# Altium PCB PCB_motor_driver_v3.PcbDoc
Units mil, origin at the board's own origin, x right, y up, seen from the top; angles counter-clockwise.
Board outline 912.08 x 872.97 mil, 4 copper layers (Top Layer, Signal Layer 1, Signal Layer 2, Bottom Layer), stack 21.634 mil thick; 57 components, 62 nets, 286 pads, 107 vias.
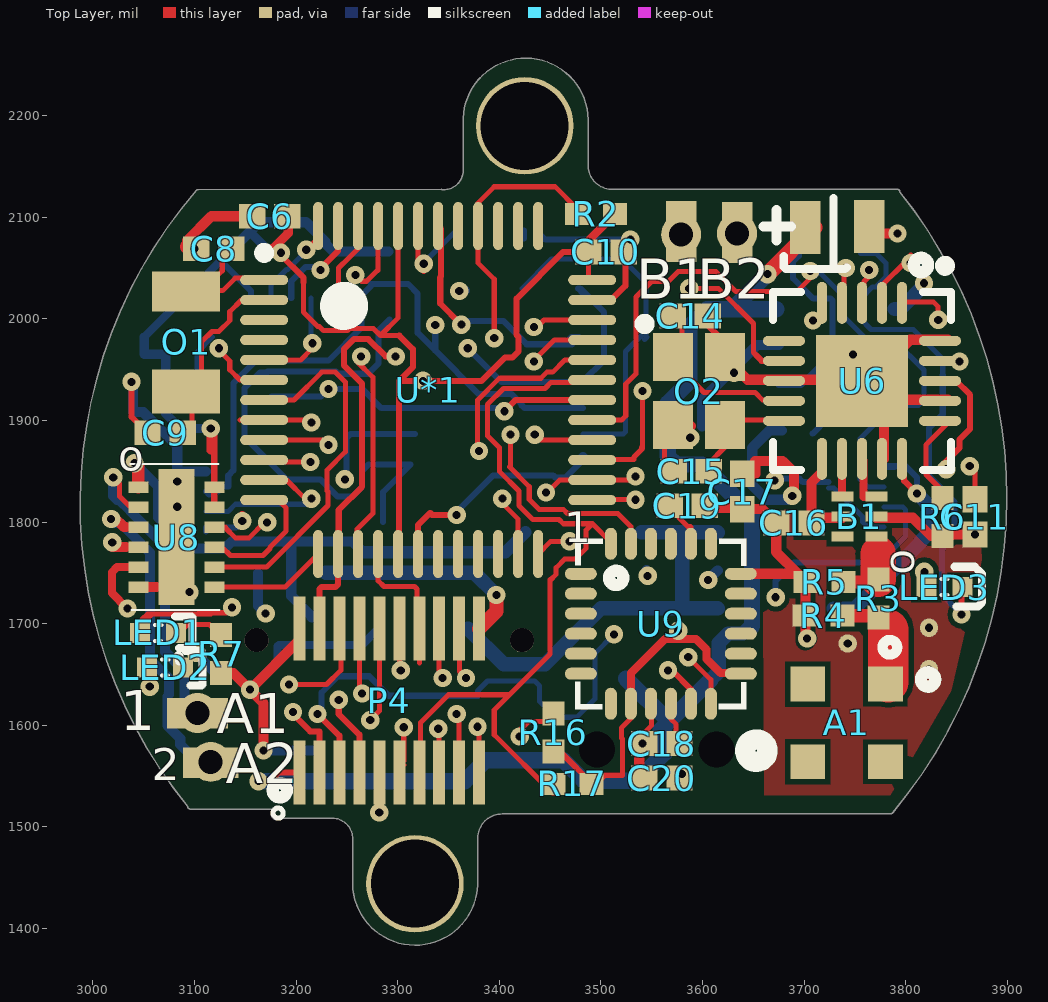
[diagram p0: Top Layer view]
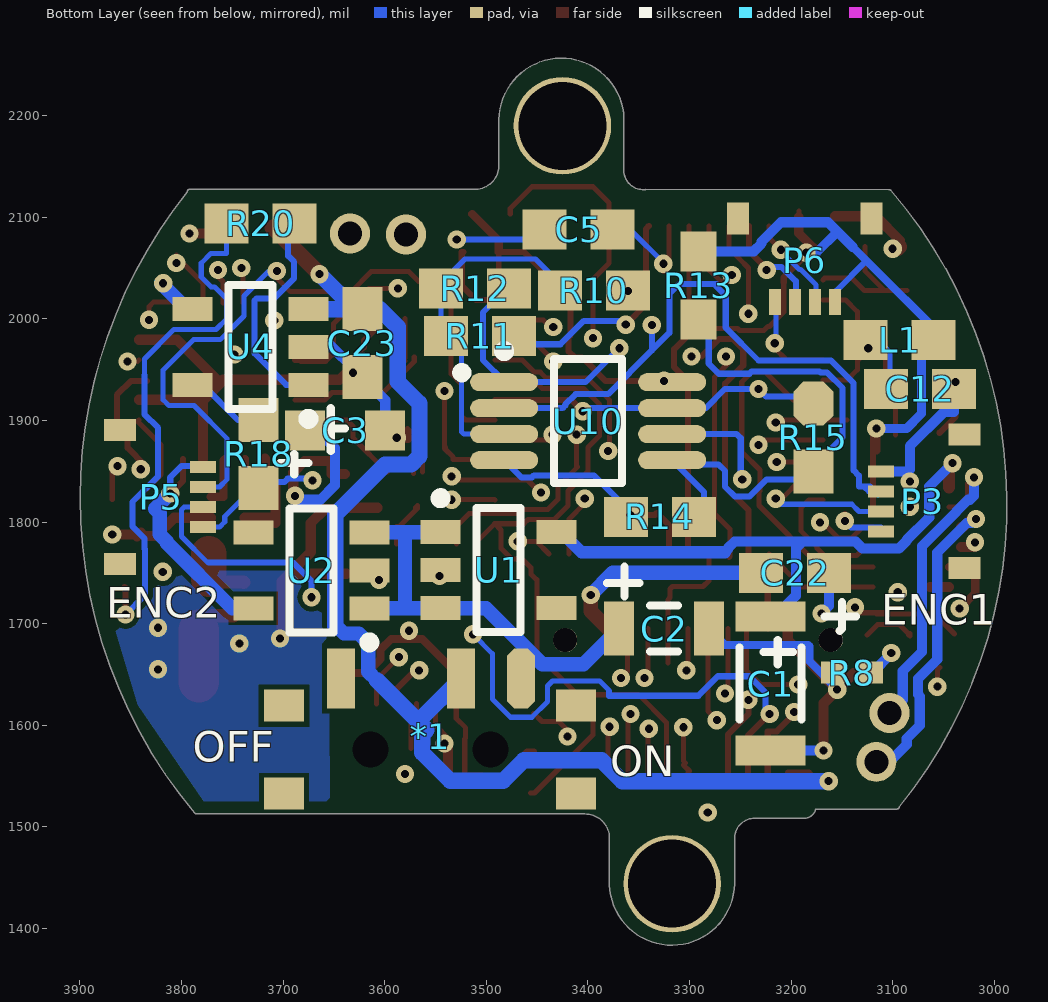
[diagram p1: Bottom Layer view, seen from below]
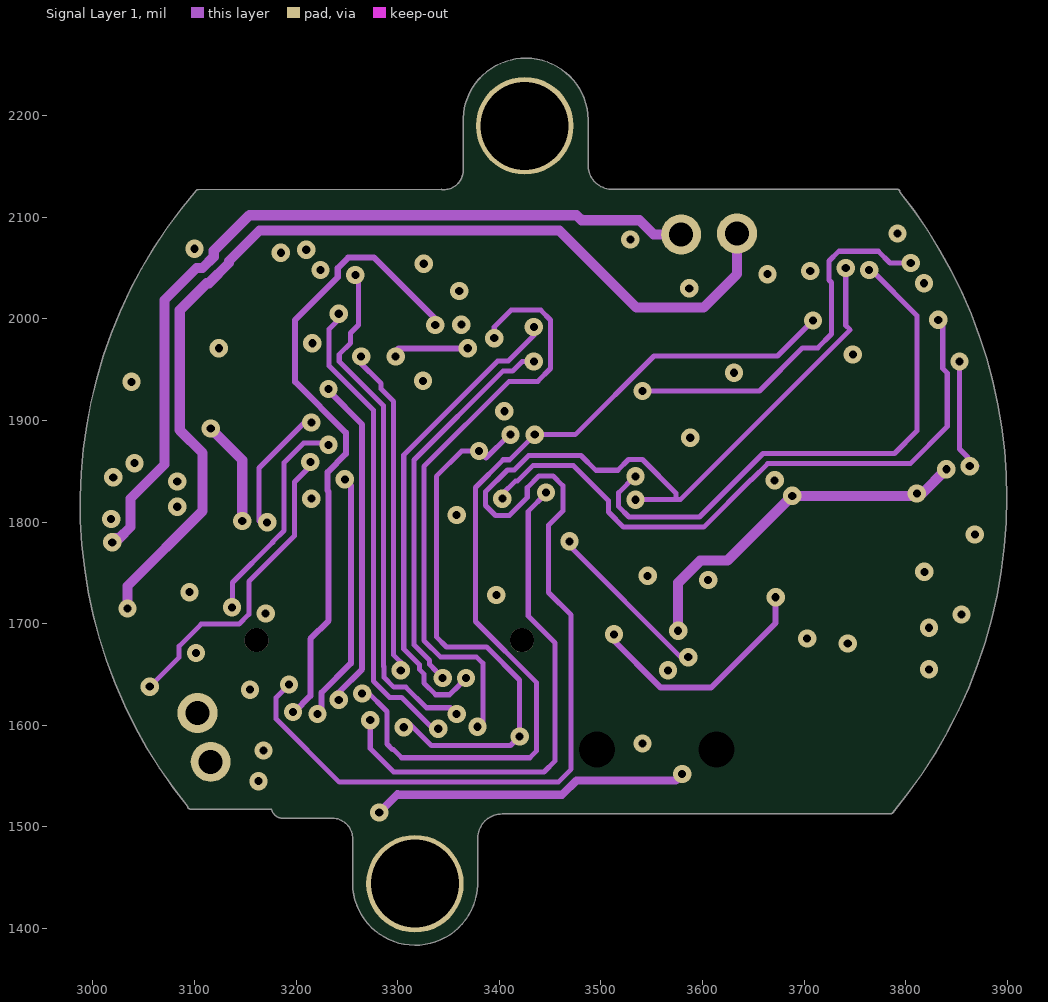
[diagram p2: Signal Layer 1]
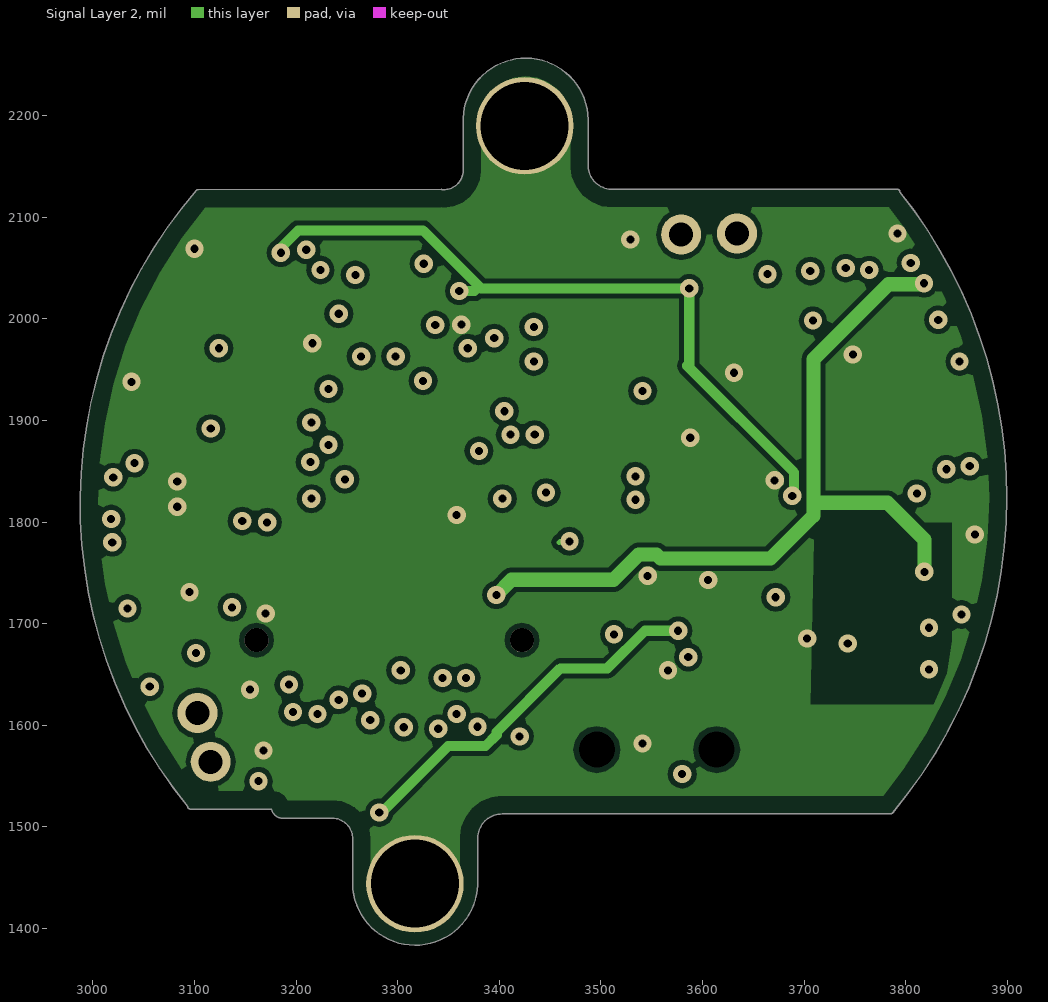
[diagram p3: Signal Layer 2]
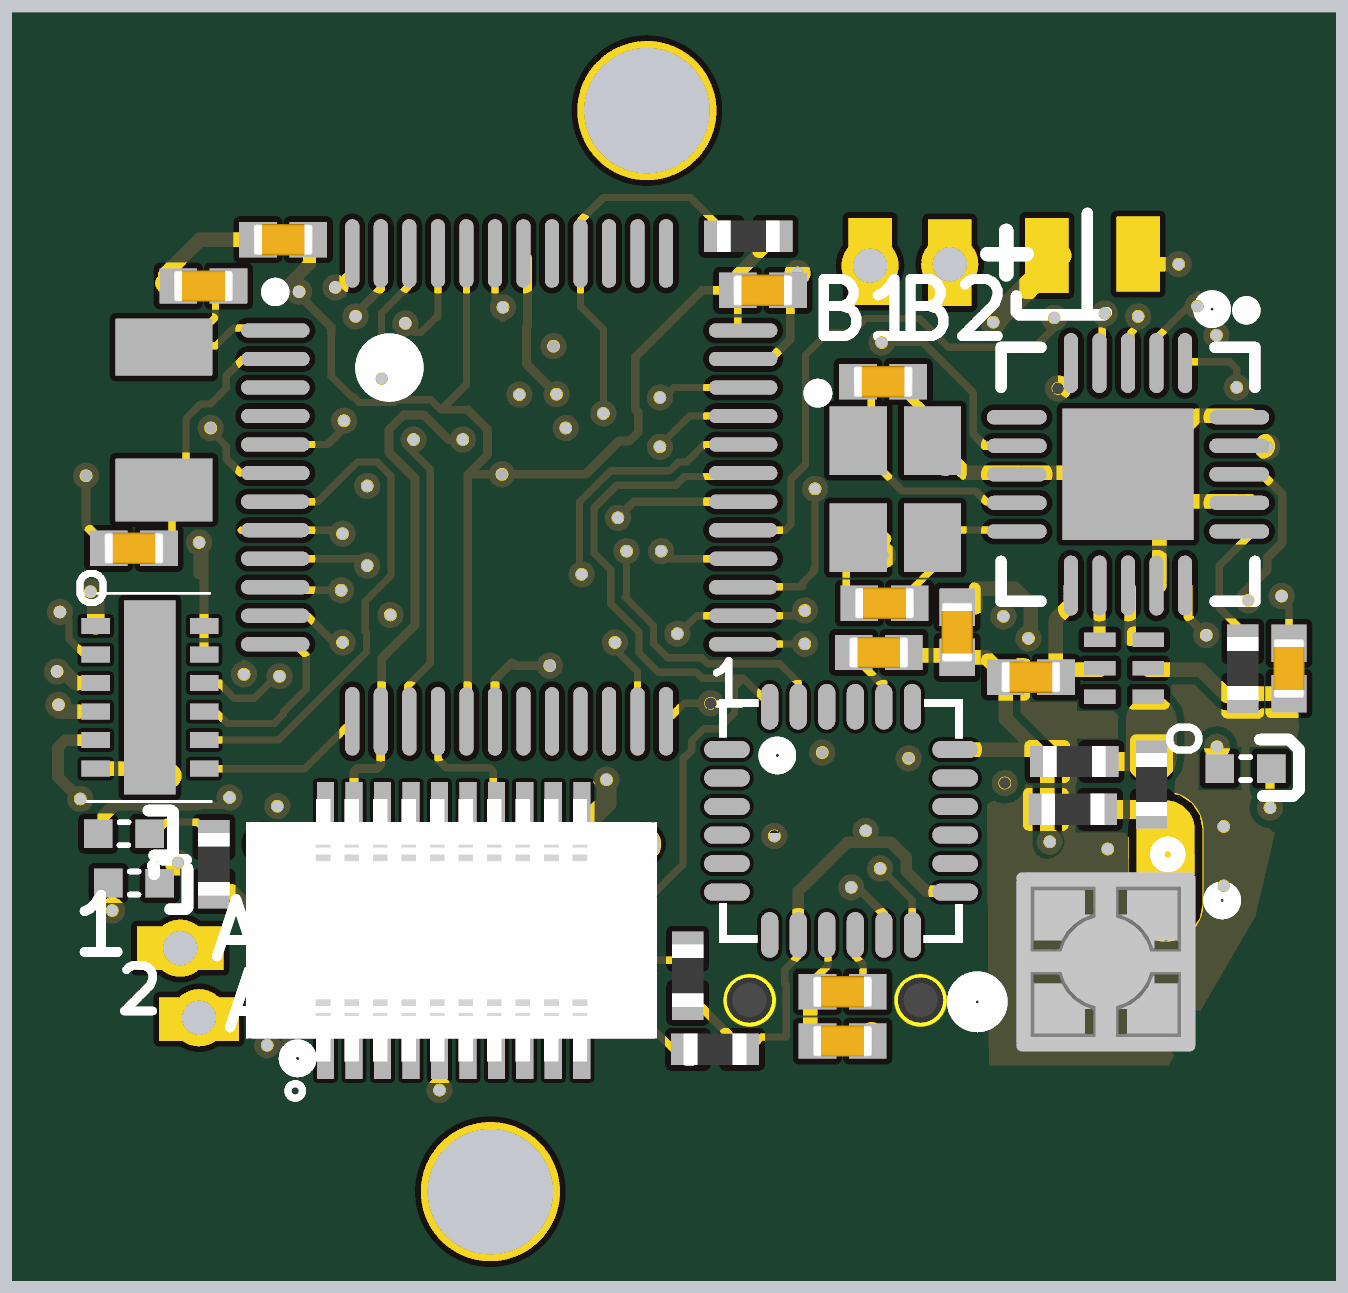
[diagram p4: 3D render of the assembled board from above, using the file's embedded part models]

## Layer stack, top to bottom
Top Solder: solder mask 0.4, Solder Resist, Dk 3.5
Top Layer: signal copper 1.4
Dielectric 1: core 3, FR-4, Dk 4.2
Signal Layer 1: signal copper 1.417
Dielectric 3: prepreg 5, Dk 4.2
Signal Layer 2: signal copper 1.417
Dielectric 2: core 8, Dk 4.2
Bottom Layer: signal copper 1.4
Bottom Solder: solder mask 0.4, Solder Resist, Dk 3.5

## Board outline
3187,1508.48 3234,1508.48 ccw(c3234,1511) 3234.17,1508.49 cw(c3235.55,1488.45) 3255.59,1489.91 3255.59,1444 ccw(c3258.11,1444) 3255.6,1443.88 cw(c3317.16,1445.01) 3255.59,1444.02 cw(c3258.11,1444.06) 3255.59,1444.06 3255.6,1443.88 ccw(c3317.16,1445.01) 3378.69,1442.78 ccw(c3376.18,1443) 3378.7,1443 3378.7,1488.99 cw(c3402.69,1488.69) 3402.97,1512.68 ccw(c3403,1515.2) 3403,1512.68 3785,1512.68 ccw(c3785,1515.2) 3787.04,1513.73 ccw(c3785.23,1515.48) 3787.16,1513.86 ccw(c3416.39,1823.74) 3899.61,1823.74 ccw(c3416.39,1823.74) 3794.27,2124.92 ccw(c3791.76,2125) 3794.27,2125 ccw(c3791.76,2125) 3791.76,2127.51 3512,2127.51 ccw(c3512,2125) 3511.88,2127.51 cw(c3511.01,2150.99) 3487.53,2150.1 ccw(c3485.02,2150) 3487.51,2150.35 3487.51,2195 ccw(c3484.99,2195) 3487.46,2195.48 ccw(c3485,2196) 3487.51,2196 ccw(c3485,2196) 3487.51,2196.04 ccw(c3425.95,2195.05) 3364.42,2197.3 ccw(c3366.92,2197) 3364.41,2197 3364.41,2144.08 ccw(c3366.92,2144.08) 3364.43,2143.72 cw(c3345.4,2146.4) 3343.3,2127.3 cw(c3345.4,2146.4) 3343.28,2127.3 3343.3,2127.3 ccw(c3343,2124.8) 3343,2127.32 3103.61,2127.29 ccw(c3103.61,2124.78) 3101.71,2126.42 ccw(c3460.68,1818.11) 3093.33,1519.84 ccw(c3095.84,1520) 3095.84,1517.48 3175.76,1517.48 ccw(c3187,1520)

## Design rules (kind name [scope] priority, off if disabled: settings)
Clearance [All] p1: gap=5 ignorepadtopadclearanceinfootprint=FALSE except(0: Arc-Hole Track-Hole SMDPad-Hole THPad-Hole Via-Hole Fill-Hole Poly-Hole Region-Hole Text-Hole; 6: Track-SMDPad)
MinimumSolderMaskSliver [All] p1 off: minsoldermaskwidth=5
PolygonConnect [All] p1: connectstyle=Direct reliefconductorwidth=10 reliefentries=4 polygonreliefangle="90 Angle" airgapwidth=10
RoutingVias [All] p1: holewidth=8 width=18 viastyle="Through Hole" minholewidth=8 minwidth=18 maxholewidth=28 maxwidth=50
SilkToSilkClearance [All] p1 off: silktosilkclearance=10
SilkToSolderMaskClearance [IsPad] p1 off: minsilkscreentomaskgap=10 clearancetoexposedcopper=TRUE
SolderMaskExpansion [All] p1: expansion=4 istentingtop=FALSE
Width [All] p1: maxlimit=50 minlimit=5 preferedwidth=5
27 further rules are at their usual default settings.

## Components (designator, comment, footprint, x,y, rotation, side; value= is the part's Value field where it differs from the comment)
*1 "ON_OFF_SWITCH" SWTICH_SMD_SIDE 3940,1516 r180 bottom
A1 "2.4GHz SMT On-ground MID Chip Antenna" 47948-0001 3734,1713 r270 top
B1 "2.45 GHz Bulan" 2450BM14A0002 3770,1821 r270 top
C1 "100uF 6.3V" CAP1206 3220,1641 r270 bottom
C2 "10uF 16V" CAP0805 3325,1695 r180 bottom
C3 "10uF 6.3V" "0805 TANTALUM" 3667,1889 r180 bottom
C5 "0.1uF" 0603W#1 3408,2088 r0 bottom
C6 "0.1uF" "0402 CAPACITOR" 3174,2100 r180 top
C8 "18pF" "0402 CAPACITOR" 3119,2068 r180 top
C9 "18pF" "0402 CAPACITOR" 3071,1887 r180 top
C10 "0.1uF" "0402 CAPACITOR" 3505,2065 r180 top
C11 "33nF X7R, +/- 10%" "0402 CAPACITOR" 3869,1805 r270 top
C12 "0.1uF" 0603W#1 3072,1931 r0 bottom
C14 "6pF NPO, +/- 2%" "0402 CAPACITOR" 3588,2002 r180 top
C15 "6pF NPO, +/- 2%" "0402 CAPACITOR" 3589,1851 r0 top
C16 "2200pF 5%" "0402 CAPACITOR" 3690,1800 r0 top
C17 "0.1uF" "0402 CAPACITOR" 3640,1830 r270 top
C18 "0.1uF" "0402 CAPACITOR" 3560,1581 r180 top
C19 "2200pF" "0402 CAPACITOR" 3585,1817 r0 top
C20 "10000pF" "0402 CAPACITOR" 3560,1547 r180 top
C22 "10uF 16V" 0603W#1 3197,1750 r180 bottom
C23 "4.7uF 10V" 0603W#1 3622,1977 r270 bottom
L1 "Ferrite bead" 0603W#1 3094,1979 r180 bottom
LED1 "LED BLUE" 0402W 3049,1691 r0 top
LED2 "LED RED" 0402W 3056,1657 r0 top
LED3 "LED ORANGE" 0402W 3823,1736 r0 top
O1 "32.768 kHz" "32.768 Crystal" 3091,2024 r45 top
O2 "16 MHz Crystal Cl=8pF" "2.5 x 2.0 crystal" 3621,1961 r270 top
P3 "FH33J-4S-0.5SH(99)" FH33J-4S-0.5SH(99) 3235,1820 r0 bottom
P4 "CONN HEADER 20POS" "DF12 20 POS" 3350,1630 r0 top
P5 "FH33J-4S-0.5SH(99)" FH33J-4S-0.5SH(99) 3655,1825 r180 bottom
P6 "FH33J-4S-0.5SH(99)" FH33J-4S-0.5SH(99) 3186,1893 r270 bottom
R2 "10K" "0402 RESISTOR" 3495,2105 r180 top
R3 "4.7K" "0402 RESISTOR" 3775,1725 r90 top
R4 "4.7K" "0402 RESISTOR" 3719,1706 r0 top
R5 "4.7K" "0402 RESISTOR" 3720,1739 r0 top
R6 "22K 1%" "0402 RESISTOR" 3838,1805 r90 top
R7 "330" "0402 RESISTOR" 3128,1670 r90 top
R8 "330" "0402 RESISTOR" 3140,1650 r180 bottom
R10 "50K" 0603W#1 3395,2028 r180 bottom
R11 "20K" 0603W#1 3505,1983 r0 bottom
R12 "200K" 0603W#1 3510,2030 r0 bottom
R13 "50K" 0603W#2 3291,2032 r90 bottom
R14 "20K" 0603W#1 3330,1805 r180 bottom
R15 "200K" 0603W#3 3178,1884 r270 bottom
R16 "4.7K" "0402 RESISTOR" 3455,1593 r90 top
R17 "4.7K" "0402 RESISTOR" 3472,1544 r180 top
R18 "4.99K 1%" 0603W#1 3724,1866 r90 bottom
R20 "1K 5%" 0603W#1 3723,2094 r180 bottom
U1 "3.7V REG" SOT-23-5 3545,1790 r180 bottom
U2 "3.3 V REG" SOT-23-5 3615,1715 r0 bottom
U4 "MCP73831T" SOT-23-5 3675,1935 r0 bottom
U6 "nRF24L01+" QFN20 3757,1939 r270 top
U8 "DRV8835" WSON-16 3082,1785 r0 top
U9 "MPU 6050" QFN24 3510,1740 r0 top
U10 "MCP6422" MSOP-MS8_N 3400,1900 r180 bottom
U*1 "ATSAMD21G" TQFN48 3330,1930 r0 top

## Footprints (in the part's own frame and the unit in brackets; to place one, negate y for a bottom-side part, rotate by r counter-clockwise, add the part's x,y. Pads: shape width x height; smd on the part's side, far side on the other; paste and mask are expansions set on the pad)
"2.5 x 2.0 crystal" [mm]
  rect 1.2x1 smd: 1(-0.033,-1.273) 2(1.667,-1.273) 3(1.667,0.026) 4(-0.033,0.025)
  body extent -0.46,-1.62 2.05,0.38, height 0.5
"32.768 Crystal" [mm] "for BLE radio"
  rect 1x1.7 smd rot 45: 1(0.063,0.036)
  rect 1.1x1.7 smd rot 45: 2(-1.705,-1.733)
  body extent -2.49,-2.54 0.83,0.78, height 0.9
"0402 CAPACITOR" [mm]
  rect 0.66x0.62 smd: 1(-0.441,-0.024) 2(0.439,-0.024)
  body extent -0.53,-0.3 0.52,0.25, height 0.55
"0402 RESISTOR" [mm]
  rect 0.6x0.55 smd: 1(-0.476,0.046) 2(0.474,0.046)
  body extent -0.55,-0.23 0.55,0.32, height 0.4
0402W [mm]
  rect 0.5x0.5 smd: 1(-0.066,0) 2(0.834,-0.001)
  silkscreen extent 0.31,-0.2 0.46,0.2, body extent -0.08,-0.25 0.85,0.25, height 0.2
0603W#1 [mm]
  rect 1.1x1 smd: 1(-0.825,0) 2(0.875,0)
  body extent -0.77,-0.4 0.83,0.4, height 0.8
0603W#2 [mm]
  rect 1x0.9 smd: 1(-0.825,0) 2(0.875,0)
  body extent -0.77,-0.4 0.83,0.4, height 0.8
0603W#3 [mm]
  oct 1.1x1 smd: 1(-0.825,0)
  rect 1.1x1 smd: 2(0.875,0)
  body extent -0.77,-0.4 0.83,0.4, height 0.8
"0805 TANTALUM" [mm]
  rect 1x1 smd: 1(-0.285,0.032) 2(1.716,0.032)
  body extent -0.28,-0.66 1.72,0.69, height 1.5
2450BM14A0002 [mm] "Balun for nRF8001"
  rect 0.25x0.55 smd: 1(0.901,0.027) 2(0.401,0.027) 3(-0.1,0.028) 4(-0.1,-0.822) 5(0.401,-0.823) 6(0.901,-0.823)
  body extent -0.39,-0.78 1.21,0.02, height 0.6
47948-0001 [mm] "2.4GHz SMT On-ground MID Chip Antenna"
  rect 0.87x0.87 smd: 1(1.84,1.168) 2(3.78,1.168) 3(1.84,-0.772) 4(3.78,-0.772)
  silkscreen extent 0.74,1.1 1.11,1.47, body extent 1.23,-1.37 4.37,1.77, height 4
CAP0805 [mm] "Chip Capacitor, 2-Leads, Body 2.0x1.2mm, IPC Medium Density"
  rect 0.75x1.35 smd: 1(-1.125,0) 2(1.125,0)
  silkscreen extent -0.35,-0.58 0.35,0.58, body extent -1,-0.62 1,0.63, height 0.78
CAP1206 [mm] "Chip Capacitor, 2-Leads, Body 3.2x1.6mm, IPC Medium Density"
  rect 0.75x1.75 smd: 1(-1.675,0) 2(1.675,0)
  silkscreen extent -0.9,-0.77 0.9,0.77, body extent -1.6,-0.8 1.6,0.8, height 1
"DF12 20 POS" [mm]
  round 0.6 hole 0.6: 1(-4.801,1.366) 1(1.836,1.365)
  rect 0.3x1.6 smd mask+0.07: 1(-3.73,-1.947) 2(-3.73,1.653) 3(-3.229,-1.947) 4(-3.229,1.653) 5(-2.729,-1.947) 6(-2.729,1.653) 7(-2.23,-1.947) 8(-2.229,1.653) 9(-1.73,-1.947) 10(-1.73,1.653) 11(-1.23,-1.947) 12(-1.23,1.653) 13(-0.73,-1.947) 14(-0.73,1.653) 15(-0.236,-1.947) 16(-0.236,1.653) 17(0.264,-1.947) 18(0.265,1.653) 19(0.764,-1.947) 20(0.765,1.653)
  silkscreen extent -4.39,-3.09 -4.13,-2.83, body extent -5.12,-2.44 2.08,2.16, height 3.3
FH33J-4S-0.5SH(99) [mm]
  rect 0.65x0.3 smd mask+0.05: 1(-3.141,0.743) 2(-3.141,0.242) 3(-3.141,-0.259) 4(-3.14,-0.758)
  rect 0.8x0.55 smd mask+0.05: 5(-5.223,1.661) 6(-5.224,-1.686)
  body extent -6.16,-2.01 -3.16,1.99, height 1.2
MSOP-MS8_N [mm]
  oval 1.7x0.45 smd: 1(-2.091,0.958) 2(-2.091,0.308) 3(-2.091,-0.342) 4(-2.091,-0.992) 5(2.109,-0.992) 6(2.109,-0.342) 7(2.109,0.308) 8(2.109,0.958)
  silkscreen extent -2.22,-1.57 0.86,1.86, body extent -1.59,-1.62 1.61,1.58, height 1.1
QFN20 [mm] "QFN, 20-Leads, Body 4.00x4.00mm, Pitch 0.50mm, Thermal Pad 2.50x2.50mm, IPC Low Density"
  oval 1.05x0.25 smd: 1(-1.95,1) 2(-1.95,0.5) 3(-1.95,0) 4(-1.95,-0.5) 5(-1.95,-1) 11(1.95,-1) 12(1.95,-0.5) 13(1.95,0) 14(1.95,0.5) 15(1.95,1)
  oval 0.25x1.05 smd: 6(-1,-1.95) 7(-0.5,-1.95) 8(0,-1.95) 9(0.5,-1.95) 10(1,-1.95) 16(1,1.95) 17(0.5,1.95) 18(0,1.95) 19(-0.5,1.95) 20(-1,1.95)
  rect 2.3x2.3 smd: 21(0,0)
  silkscreen extent -3,-2.22 2.22,2.23, body extent -2.08,-2.07 2.07,2.08, height 0.8
QFN24 [mm] "pitch 0.5mm"
  oval 0.8x0.3 smd mask+0.07: 1(-0.756,0.231) 2(-0.756,-0.269) 3(-0.756,-0.768) 4(-0.756,-1.268) 5(-0.756,-1.768) 6(-0.755,-2.268) 13(3.244,-2.268) 14(3.244,-1.768) 15(3.244,-1.269) 16(3.244,-0.769) 17(3.244,-0.269) 18(3.244,0.231)
  oval 0.3x0.8 smd mask+0.07: 7(-0.006,-3.018) 8(0.494,-3.018) 9(0.994,-3.018) 10(1.494,-3.018) 11(1.994,-3.018) 12(2.494,-3.018) 19(2.494,0.981) 20(1.994,0.981) 21(1.494,0.981) 22(0.994,0.981) 23(0.494,0.981) 24(-0.006,0.981)
  silkscreen extent -0.9,-3.16 3.38,1.12, body extent -0.76,-3.02 3.24,0.98, height 1.1
SOT-23-5 [mm] "3D view"
  rect 1x0.6 smd: 1(0,0) 2(0,-0.95) 3(0,-1.9) 4(2.9,-1.9) 5(2.9,0)
  silkscreen extent -0.13,-2.5 2,0.97, body extent -0.25,-2.5 3.15,0.6, height 1.45
SWTICH_SMD_SIDE [mm]
  round 0 hole 0.9: 0(8.284,1.524) 0(11.279,1.524)
  rect 0.7x1.5 smd: 1(7.547,3.3) 2(10.547,3.3)
  oct 0.7x1.5 smd: 3(12.047,3.3)
  rect 1x0.8 smd: NC(6.122,0.425) NC(6.122,2.625) NC(13.422,0.425) NC(13.422,2.625)
  body extent 5.93,-1.27 13.63,3.73, height 1.4
TQFN48 [mm] "TSQFP, 48-Leads, Body 7.00x7.00mm, Pitch 0.50mm, IPC High Density"
  oval 1.2x0.25 smd: 1(-4.1,2.75) 2(-4.1,2.25) 3(-4.1,1.75) 4(-4.1,1.25) 5(-4.1,0.75) 6(-4.1,0.25) 7(-4.1,-0.25) 8(-4.1,-0.75) 9(-4.1,-1.25) 10(-4.1,-1.75) 11(-4.1,-2.25) 12(-4.1,-2.75) 25(4.1,-2.75) 26(4.1,-2.25) 27(4.1,-1.75) 28(4.1,-1.25) 29(4.1,-0.75) 30(4.1,-0.25) 31(4.1,0.25) 32(4.1,0.75) 33(4.1,1.25) 34(4.1,1.75) 35(4.1,2.25) 36(4.1,2.75)
  oval 0.25x1.2 smd: 13(-2.75,-4.1) 14(-2.25,-4.1) 15(-1.75,-4.1) 16(-1.25,-4.1) 17(-0.75,-4.1) 18(-0.25,-4.1) 19(0.25,-4.1) 20(0.75,-4.1) 21(1.25,-4.1) 22(1.75,-4.1) 23(2.25,-4.1) 24(2.75,-4.1) 37(2.75,4.1) 38(2.25,4.1) 39(1.75,4.1) 40(1.25,4.1) 41(0.75,4.1) 42(0.25,4.1) 43(-0.25,4.1) 44(-0.75,4.1) 45(-1.25,4.1) 46(-1.75,4.1) 47(-2.25,4.1) 48(-2.75,4.1)
  silkscreen extent -4.22,1.8 -1.8,3.55, body extent -3.5,-3.5 3.5,3.5, height 1.2
WSON-16 [mm]
  rect 0.9x3.4 smd: 0(0.001,0.003)
  rect 0.5x0.28 smd mask+0.07: 1(-0.949,1.253) 2(-0.949,0.753) 3(-0.949,0.253) 4(-0.949,-0.247) 5(-0.949,-0.747) 6(-0.949,-1.247) 7(0.951,-1.247) 8(0.951,-0.747) 9(0.951,-0.247) 10(0.951,0.253) 11(0.951,0.753) 12(0.951,1.253)
  silkscreen extent -1.15,-1.82 1.08,1.83, body extent -1,-1.5 1,1.5, height 0.8

## Part data
*1: "SPDT SMD Side Switch"
A1: "Bluetooth antenna"
B1: "for nRF8001 chip"
C1 C2 C3: library part Capacitor_pol, "Polarised capacitor"
C5 C6 C8 C9 C10 C11 C12 C14 C15 C16 C17 C18 C19 C20 C22 C23: library part Capacitor, "SMD Cap 1206"
L1: library part "INDUCTOR Low DCR"
LED1 LED2 LED3: library part LED, "LED SMD 1206/0603"
O1: library part "32.768 Crystal"
O2: library part "16 MHz Crystal Wireless", "For BLE use"
P3 P5 P6: "0.5mm FPC connector"
R2 R3 R4 R5 R6 R7 R8 R10 R11 R12 R13 R14 R15 R16 R17 R18 R20: library part Resistor
U1 U2: library part MIC5205_VOLTAGE_REG, "5V LDO SMD"
U6: "2.4 GHz Radio"
U9: library part MPU_6500, "Gyro / accelerometer combo"
U10: "4.4 µA/Amplifier, 90 kHz Op Amp"
U*1: "IC MCU 32BIT 256KB FLASH 48TQFP"

## Free pads (board coordinates)
  rect 60x30 smd paste-60: 1(3103,1612)
  rect 55x30 smd paste-60: 1(3116,1563)
  round 96 hole 86.61: 1(3317,1444) 1(3425,2190)
  rect 30x60 smd paste-60: 1(3579,2086) 1(3634,2085)
  rect 30x52 smd paste-60: 1(3701,2090) 1(3764,2091)
  round 39.37 hole 23.62: 2(3103,1612) 2(3116,1564) 2(3579,2083) 2(3634,2084)

## Via types
v1: diameter 18, hole 8, Top Layer to Bottom Layer, tented both sides, 107 vias

## Nets (pads, with @x,y where several pads share a name; then routed paths per layer and width w, separated by ;. In a path a pad name is that pad's centre, name@x,y a point inside that pad or via, vN(x,y) a via of type N, cw(c..) or ccw(c..) an arc to the next point about the centre after c; other vN are vias at no path point)
5V: C22.1 LED3.1 P4.20 U4.4 | length 1058.8
  Top Layer w14: P4.20 3397.14,1712.11 v1(3397.14,1728.29)
  Signal Layer 1 w14: v1@3817,1751 v1(3818.39,1751)
  Signal Layer 2 w14: v1(3397.14,1728.29) 3412.04,1743.19 3512.49,1743.19 3537.3,1768 3554.7,1768 3558.7,1764 3667,1764 3709.3,1806.3 3709.3,1819 ; v1(3818,2035) 3817,2034 3783,2034 3709.3,1960.3 3709.3,1819 ; v1(3818.39,1751) 3818.39,1782.61 3782,1819 3709.3,1819
  Bottom Layer w14: C22.1 3375.43,1750 v1(3397.14,1728.29) ; U4.4 3794.8,2009.8 3820,2035 v1(3818,2035)
A5_AUX: P6.3 U*1.47 | length 104.2
  Top Layer w6: v1(3224,2048) 3224,2049.47 3241.42,2066.89 U*1.47
  Bottom Layer w6: P6.3@3195.19,2020.64 3195.19,2037.01 3209.18,2051 3217.04,2051 3217.15,2051.1 3223,2051.1 3224,2050.1 v1(3224,2048)
AINT1: U8.10 U*1.8 | length 271.1
  Top Layer w5: U8.10 3130.5,1794.96 3130.5,1794.17 3140.17,1784.5 3153.83,1784.5 3169.02,1799.68 v1(3171.5,1799.68) ; U*1.8@3145,1900.47 U*1.8 3212.53,1900.47 v1(3215,1898)
  Signal Layer 1 w5: v1(3171.5,1799.68) 3164.82,1799.68 3163.5,1801 3163.5,1853.16 3208.34,1898 v1(3215,1898)
  Signal Layer 2 w5: v1@3171.5,1793.5 v1(3171.5,1799.68)
AINT2: U8.9 U*1.12 | length 132.4
  Top Layer w5: U8.9 3127.14,1775.28 3135.42,1767 3167.41,1767 3174.28,1773.87 3174.28,1775.28 3190,1791 3190,1814 3182.27,1821.73 U*1.12
AOUT1: pad.1@3103,1612 pad.2@3103,1612 U8.2 | length 311.6
  Top Layer w5: v1(3020,1844) 3026.3,1837.7 3026.3,1825.3 3036.96,1814.65 U8.2
  Bottom Layer w10: v1(3020,1844) 3020,1825.92 3023.92,1822 3025.87,1822 3037,1810.87 3037,1810.33 3071.12,1776.21 3071.12,1672.29 3090,1653.41 3090,1625 pad.2@3103,1612
AOUT2: pad.1@3116,1563 pad.2@3116,1564 U8.3 | length 311.7
  Top Layer w5: 3031.61,1796 3032.65,1794.96
  Top Layer w10: v1@3019.87,1806 3030.91,1794.96 3032.65,1794.96
  Bottom Layer w10: v1(3018,1803) 3022,1799 3027.12,1799 3056.12,1770 3056.12,1664.75 3075,1645.87 3075,1630.13 3073.31,1628.44 3073.31,1599.7 3086.02,1587 3086.02,1581 3111.02,1556 pad.2@3114,1556
BIN1: U8.8 U*1.7 | length 361.8
  Top Layer w5: U8.8 3170.93,1755.59 3231.5,1816.17 3231.5,1829.83 3230.6,1830.73 3230.6,1851.27 3248.5,1869.17 3248.5,1937.83 3238.83,1947.5 3225.17,1947.5 3197.82,1920.16 U*1.7
BIN2: U8.7 U*1.13 | length 115.8
  Top Layer w5: U8.7 3189.06,1735.91 U*1.13
BOUT1: pad.1@3579,2086 pad.2@3579,2083 U8.4 | length 835.3
  Top Layer w10: v1@3019,1775.28 3032.65,1775.28
  Signal Layer 1 w10: v1(3019,1780) 3016.13,1780 3020.13,1784 3025.87,1784 3037,1795.13 3037,1823.13 3070.5,1856.63 3070.5,2018.5 3102,2050 3107.87,2050 3119,2061.13 3119,2067 3154,2102 3476,2102 3481,2097 3538,2097 3552,2083 pad.2@3579,2083
BOUT2: pad.1@3634,2085 pad.2@3634,2084 U8.5 | length 1071
  Top Layer w8: v1(3034,1715) 3033.75,1715 3018.65,1730.11 3018.65,1750.6 3023.64,1755.59 U8.5
  Signal Layer 1 w10: v1(3034,1715) 3034,1737 3108,1811 3108,1868 3085.5,1890.5 3085.5,2008.5 3112,2035 3114.08,2035 3134,2054.92 3134,2057 3164,2087 3459,2087 3535,2011 3601,2011 3634,2044 pad.2@3634,2084
CE: U6.1 U*1.23 | length 746.9
  Top Layer w5: v1(3403,1823) 3403,1818.38 3418.58,1802.8 U*1.23 ; U6.1@3796.37,2016.77 3827.23,2016.77 3832,2012 v1(3832,1999)
  Signal Layer 1 w5: v1(3403,1823) 3403,1827.5 3415.75,1840.25 3417.77,1840.25 3433.02,1855.5 3473,1855.5 3507.5,1821 3507.5,1809.83 3522.33,1795 3601.14,1795 3648.07,1841.93 3648.59,1841.93 3664.17,1857.5 3804.5,1857.5 3840.93,1893.93 3840.93,1946.74 3836.5,1951.17 3836.5,1994.5 v1(3832,1999)
CSN: U6.2 U*1.27 | length 538.5
  Top Layer w5: U*1.27 3491.42,1861.5 3532.5,1861.5 3532.5,1863.91 3541,1872.41 3540,1873.41 3541,1874.41 v1(3541,1929) ; U6.2@3778.69,2015.77 3778.69,2034.94 3798.74,2055 v1(3805,2055)
  Signal Layer 1 w5: v1(3541,1929) 3656,1929 3698.5,1971.5 3713.5,1971.5 3727,1985 3727,2035.67 3724.5,2038.17 3724.5,2056.83 3734.17,2066.5 3773.06,2066.5 3784.56,2055 v1(3805,2055)
ENC_OUT1: P3.3 P4.3 U10.2 | length 1345.8
  Top Layer w6: v1(3196.86,1613) 3196.86,1611.1 3213.96,1594 3222.86,1594 P4.3
  Signal Layer 1 w6: v1(3196.86,1613) 3198,1613 3214,1629 3214,1685 3232,1703 3232,1830.04 3231,1831.04 3231,1849.04 3249,1867.04 3249,1888.04 3199,1938.04 3199,1998.96 3241,2040.96 3241,2049.94 3251.27,2060.21 3276.79,2060.21 3337,2000 v1(3337,1994)
  Bottom Layer w6: P3.3@3114.55,1827 P3.3 3123.16,1830.19 3127.91,1834.94 ; P3.3@3122.49,1834.94 3127.91,1834.94 ; v1(3337,1994) 3337,1969 ; U10.2 3424.88,1912.12 3422,1915 3422,1916.04 3412.04,1926 3380,1926 3337,1969 ; 3127.91,1834.94 3133.18,1834.94 3133.18,1845.63 3138.32,1850.77 3138.32,1936.58 3160.87,1959.13 3203.82,1959.13 3203.96,1959 3232,1959 3264.28,1991.28 3264.28,2022.93 3273.57,2032.22 3273.57,2034.43 3310.16,2034.43 3319.69,2024.9 3319.69,1986.31 3337,1969
ENC_OUT2: P4.5 P5.3 U10.6 | length 1294.1
  Top Layer w6: v1(3221,1611) 3221.42,1611 3242.54,1589.87 P4.5
  Signal Layer 1 w6: v1(3221,1611) 3225,1615 3225,1632.04 3254,1661.04 3254,1836 v1(3248,1842) ; v1(3512.96,1689.45) 3512.96,1689 3509.96,1686 3558.96,1637 3608.36,1637 3672,1700.64 v1(3672,1726)
  Bottom Layer w5: 3379,1633.52 3379,1634.23 3388.37,1643.59 3434.78,1643.59 3439.76,1638.62 3439.76,1623.24 3455.11,1607.89 3476.12,1607.89 3494,1625.77 3494,1670.49 v1(3512.96,1689.45) ; 3773.48,1760 3774.19,1760 3799.91,1785.72 3799.91,1787.07 3800,1787.16 3800,1812 3797.19,1814.81 P5.3
  Bottom Layer w6: v1(3221,1611) 3225,1615 3225,1632.04 3241.15,1648.19 3272.04,1648.19 3291.23,1629 3379,1629 3379,1633.52 ; v1(3248,1842) 3249.52,1843.52 3249.52,1882.52 3253.53,1886.53 U10.6 ; v1(3512.96,1689.45) v1@3514.4,1688 ; v1(3672,1726) 3672,1742 3690,1760 3773.48,1760
GND: B1.2 C1.2 C2.2 C3.2 C5.2 C6.2 C8.2 C9.2 C10.1 C11.2 C12.1 C14.1 C15.1 C16.1 C17.2 C18.2 C19.2 C20.2 C22.2 C23.2 O2.2 O2.4 P3.4 P4.2 P5.4 P6.4 pad.1@3317,1444 pad.1@3425,2190 pad.1@3764,2091 R4.1 R5.1 R6.1 R7.1 R8.1 R11.1 R14.1 R18.1 U1.2 U2.2 U4.2 U6.8 U6.14 U6.17 U6.20 U6.21 U8.0 U8.6 U9.9 U9.11 U9.18 U10.4 U*1.5 U*1.18 U*1.35 U*1.42 | length 2849.2
  Top Layer w5: U*1.5 3204.53,1959.53 3216,1971 v1(3216,1976) ; v1(3541,1582) 3541,1582.61 3536.81,1586.81 3550,1600 3550,1620.32 U9.9 ; O2.2@3562,1889 3574.51,1889 O2.2@3577.38,1891.86 ; C15.1@3562.65,1849.07 3562.65,1877.14 3568.51,1883 v1(3588,1883) ; C15.1@3571.65,1847.88 C15.1 ; C19.2@3607.3,1814.07 C19.2@3607.3,1814.43 ; O2.4@3620.35,1971.94 O2.4@3626,1966.28
  Top Layer w6: v1(3038,1938) 3038,1903.63 C9.2 ; U*1.18 3320.16,1797.16 3332,1809 3334,1807 v1(3358,1807) ; U*1.42 3342.68,2088.57 3342.68,2041.64 3341.9,2040.86 3341.9,2015.1 v1(3362.68,1994.32) v1@3362.37,1994 ; U*1.35 3510.12,2018.58 3524.04,2032.5 3524.04,2065.93 C10.1 ; v1(3529,2078) C10.1@3529.73,2078 ; v1(3566,1654) 3570,1654 3588.5,1635.5 U9.11 ; C14.1 3605.35,1993.65 3620.35,1978.65 O2.4@3620.35,1971.94
  Top Layer w10: U8.6 3062.91,1735.91 3063,1736 ; C8.2@3092.7,2070.93 3092.7,2077.04 3116.59,2100.93 C6.2 ; R7.1@3125.19,1651.28 3138.33,1651.28 v1(3154.6,1635) ; v1(3167.94,1575.06) 3167.94,1621.66 v1(3154.6,1635) ; P4.2 3203.17,1683.57 v1(3154.6,1635) ; C20.2@3537.7,1548.93 3537.7,1578.7 v1(3541,1582) ; v1(3546,1747) 3546,1746 v1@3547,1745 ; v1(3588,1883) 3577.27,1883 O2.2@3588.64,1894.36 ; v1@3603,1743 v1(3605.6,1743) ; C19.2@3607.3,1814.07 3637.7,1814.07 C17.2 3659.03,1812.7 C16.1 3672.65,1770.43 R5.1@3693.98,1749.11 ; O2.4 3644.3,1939.99 U6.8@3682.23,1939.99 ; U9.18 R5.1@3693.98,1749.11 ; U6.8@3682.23,1939 U6.8@3682.23,1939.99 ; v1(3703,1685.45) 3701.28,1683.72 3701.28,1741.81 R5.1@3693.98,1749.11 ; U6.21@3759,1939 3778.69,1919.31 U6.14@3778.69,1862.23 ; U6.21@3759,1940 U6.8@3682.23,1940 ; pad.1@3765,2092 3773,2084 v1(3792,2084) ; B1.2@3771.08,1804.22 3807,1804.22 3824.95,1786.28 R6.1 ; R6.1@3839.69,1789.78 3843.7,1785.77 3845.62,1787.7 v1(3868.07,1787.7) ; U6.17@3841.77,1920.32 3784.69,1920.32 3765,1940 3804.37,1979.37 U6.20@3841.77,1979.37
  Top Layer w14: C8.2@3092.7,2070.93 3094.63,2069 v1(3100,2069) ; v1@3169,1710 v1(3170,1710)
  Signal Layer 1 w6: v1(3566,1654) v1@3568,1656
  Signal Layer 1 w10: v1(3154.6,1635) v1@3157,1635
  Bottom Layer w5: P6.4@3214.85,2020.61 3214.85,1972.15 3216,1973.3 v1(3216,1976) ; R18.1 3729.21,1833.52 3757.36,1805.37 3757.36,1800.16 3762.37,1795.15 P5.4
  Bottom Layer w6: v1(3358,1807) 3358,1810 3394,1846 3453.04,1846 3455.04,1844 3465.39,1844 U10.4 ; v1@3362.68,1998 3403.96,1998 3426.96,1975 R11.1@3464,1975 ; C5.2@3424.45,2079.27 C5.2@3424.45,2087 ; C5.2@3436.45,2087 3445.45,2078 v1(3529,2078) ; v1(3671,1841) 3672.77,1842.77 3695.34,1842.77 3698.8,1839.31 R18.1@3724.12,1839.31 ; R11.1@3464,1975 3471.52,1975 3478.52,1982 3471,1982 R11.1@3464,1975
  Bottom Layer w8: v1(3154.6,1635) 3154.6,1635.76 3181.8,1662.96 3181.8,1677.8 3183,1679 3264.71,1679 C2.2
  Bottom Layer w10: C12.1 3039.52,1908.2 3049.64,1908.2 3083,1874.84 3083,1852 3085.15,1849.85 P3.4 ; C22.2 3162.55,1717.45 v1(3170,1710) ; v1(3167.94,1575.06) C1.2 ; U10.4 U10.4@3482.33,1864 ; U1.2 3545,1747 v1(3546,1747) ; C3.2@3599.43,1894 3599.43,1919.98 C23.2 ; v1(3605.6,1743) U2.2 ; C23.2@3628.72,1949.28 3653.85,1974.4 U4.2@3675,1974.4
  Bottom Layer w14: v1(3170,1710) v1@3171.06,1708.94
  other v1: 3823,1655 3743,1680.45 3823,1696 3095,1731 3083,1815 3083,1840 3631,1947 3748,1965
INT_ENC1: P4.4 R12.1 U10.1 U*1.14 | length 694
  Top Layer w6: P4.4 3222.87,1733.87 3224.96,1735.96 3238.7,1735.96 3241.42,1738.68 U*1.14 3242,1769.17 3242,1811.96 3265,1834.96 3265,1936.18 3247,1954.18 3247,1970.04 3256.96,1980 3271.04,1980 3288.04,1963 v1(3298,1963)
  Signal Layer 1 w6: v1(3298,1963) 3298,1968 3301,1971 v1(3369,1971)
  Bottom Layer w6: v1(3369,1971) 3402.29,1937.71 U10.1 3482.33,1938.57 3503.17,1959.41 3503.17,2006.41 3479.59,2030 R12.1 R12.1@3482.33,2025.19
INT_ENC2: P4.7 R15.1 U10.7 U*1.30 | length 745.6
  Top Layer w6: v1(3242,1625) 3242,1611 3262.22,1590.78 P4.7 ; v1(3405,1909) 3416.16,1920.16 U*1.30
  Signal Layer 1 w6: v1(3232,1931) 3232,1929 3265,1896 3265,1655.23 3242,1632.23 v1(3242,1625) ; v1(3405,1909) v1@3406.47,1909
  Bottom Layer w6: R15.1@3176,1923.48 3178,1923.48 3224.48,1923.48 v1(3232,1931) 3265,1931 3283.88,1912.12 U10.7 3405.59,1912.12 3405,1911.53 v1(3405,1909)
INT_IMU: U9.12 U*1.24 | length 268.1
  Top Layer w5: U*1.24 3450.68,1781 v1(3469,1781) ; v1(3586,1667) 3608.18,1644.82 U9.12
  Signal Layer 1 w5: v1(3469,1781) 3469,1776.67 3578.67,1667 v1(3586,1667)
  Signal Layer 2 w5: 3459,1780 3460,1781 v1(3469,1781)
IR_SEND1: P3.2 U*1.11 | length 162.9
  Top Layer w5: U*1.11 3190.58,1841.42 3209,1823 v1(3215,1823)
  Bottom Layer w5: P3.2 3133.12,1810.46 3140.17,1817.5 3209.5,1817.5 v1(3215,1823)
IR_SEND2: P5.2 U*1.29 | length 702.1
  Top Layer w5: U*1.29 3520.47,1900.47 3524.5,1904.5 3524.5,1935.83 3534.5,1945.83 3534.5,2021.5 3549.75,2036.75 3566.42,2036.75 3576.17,2046.5 3613.13,2046.5 3632.86,2026.77 3692.77,2026.77 3708,2042 3706.07,2043.93 v1(3706.07,2047)
  Bottom Layer w5: v1(3706.07,2047) 3706.07,2046.93 3711,2042 3715,2046 3738.5,2022.5 3738.5,2002.82 3761.83,1979.49 3788.2,1979.49 3818,1949.69 3818,1920.31 3812.38,1914.69 3787.69,1914.69 3755,1882 3755,1842 3762.46,1834.54 P5.2
IRQ: U6.6
LED1: LED1.1 U*1.9 | length 422.7
  Top Layer w5: LED1.1@3039,1689.81 LED1.1@3048.37,1699.18 ; v1(3137,1716) 3131.69,1710.69 3117,1710.69 ; U*1.9 3227.21,1880.79 v1(3232,1876) ; LED1.1@3048.37,1699.18 3058.88,1709.69 ; LED1.1@3048.37,1699.18 3048.37,1704.15 3053.9,1709.69 3058.88,1709.69 ; 3058.88,1709.69 3103.29,1709.69 ; 3103.29,1709.69 3116,1709.69 3117,1710.69 ; 3103.29,1709.69 3104.29,1710.69 3117,1710.69
  Signal Layer 1 w5: v1(3137,1716) 3138,1717 3138,1720 3137.5,1720.5 3137.5,1740.5 3177,1780 3177,1780.5 3188,1791.5 3188,1858.33 3207.27,1877.6 3230.4,1877.6 v1(3232,1876)
LED2: LED2.1 U*1.10 | length 374.7
  Top Layer w5: LED2.1 3056,1654.39 v1(3056,1638) ; U*1.10 3170.68,1859 v1(3214,1859)
  Signal Layer 1 w5: v1(3056,1638) 3084.91,1666.91 3084.91,1677.86 3106.54,1699.5 3143.83,1699.5 3153.5,1709.17 3153.5,1741.5 3198.5,1786.5 3198.5,1839.5 3214.1,1855.1 3214,1855.2 v1(3214,1859)
MISO: P4.8 U6.5 U*1.28 | length 1029.8
  Top Layer w5: P4.8 3262.22,1633.96 v1(3265,1631.19) ; v1(3434.87,1886) 3440.08,1880.79 U*1.28
  Signal Layer 1 w5: v1(3265,1631.19) 3267.81,1634 3269,1634 3289.5,1613.5 3289.5,1581.5 3295,1576 3296,1576 3304,1568 3430,1568 3436.5,1574.5 3436.5,1642.23 3376.5,1702.23 3376.5,1833.98 3403.84,1861.32 3410.19,1861.32 v1(3434.87,1886) 3474.67,1886 3552.16,1963.5 3673.91,1963.5 v1(3708.68,1998.28)
MOSI: P4.6 U6.4 U*1.25 | length 1526.1
  Top Layer w5: v1(3193,1640) 3230,1640 3244,1654 3244,1693.62 P4.6 ; U*1.25 3491.68,1822 v1(3534,1822) ; U6.4@3739.32,2015.77 3739.32,2048.32 v1(3741,2050)
  Signal Layer 1 w5: v1(3193,1640) 3180.36,1627.36 3180.36,1606.17 3242.52,1544 3458,1544 3470.74,1556.74 3470.74,1708.51 3448.5,1730.75 3448.5,1796.83 3462.5,1810.83 3462.5,1835.83 3452.83,1845.5 3439.17,1845.5 3427.5,1833.83 3427.5,1824.17 3409.83,1806.5 3396.17,1806.5 3386.5,1816.17 3386.5,1829.83 3407.99,1851.32 3414.7,1851.32 3428.88,1865.5 3480.5,1865.5 3495,1851 3516.67,1851 3527.17,1861.5 3540.83,1861.5 3574,1828.33 3574,1822 ; v1(3534,1822) 3574,1822 ; v1(3741,2050) 3741,1993.49 3745.32,1989.17 3578.14,1822 3574,1822
NetA1_1: A1.1 R3.1 R4.2 | length 72
  Top Layer w13: R4.2@3748.68,1707.81 R3.1@3769.19,1707.81
  Top Layer w40: A1.1@3783,1642.52 3783,1694
NetB1_1: B1.1 R3.2 R5.2 | length 67.3
  Top Layer w12: R3.2@3767.09,1741.81 R3.2@3771.08,1745.79
  Top Layer w13: R5.2 3772,1741 R3.2
  Top Layer w35: 3773,1769 3773.19,1768.81 R3.2
NetB1_3: B1.3 U6.13 | length 51.1
  Top Layer w8: U6.13 3758.46,1860.76 3758.46,1824.54 3758.85,1824.92 B1.3
NetB1_4: B1.4 U6.12 | length 37.4
  Top Layer w8: U6.12 3737.32,1825.24 B1.4
NetB1_5: B1.5 C16.2 U6.11 | length 99.9
  Top Layer w10: U6.11 3717.63,1849.33 3707.3,1839 C16.2 3712.46,1804.23 B1.5@3737.62,1804.23
NetC5_1: C5.1 U*1.43 | length 94.4
  Top Layer w5: v1@3320.16,2053.59 U*1.43 ; v1@3325.68,2046.51 v1(3325.68,2054.27)
  Bottom Layer w5: v1(3325.68,2054.27) 3325.68,2053.59 3326,2053.28 3324.9,2054.38 C5.1@3357.52,2087
NetC8_1: C8.1 O1.1 U*1.1 | length 139.9
  Top Layer w5: O1.1@3085.75,2027.75 O1.1@3107.75,2027.75 ; C8.1@3127.35,2070.93 3127.35,2047.35 O1.1@3107.75,2027.75 ; U*1.1 3166.85,2040 3140,2040 3127.75,2027.75 O1.1@3107.75,2027.75
NetC9_1: C9.1 O1.2 U*1.2 | length 169.6
  Top Layer w5: O1.2@3092.78,1929.26 3107,1943.48 3107,1977.33 3117.17,1987.5 3124,1987.5 3134.69,1998.19 3134.69,2007.02 3146.25,2018.58 U*1.2 ; C9.1@3097.35,1885.93 O1.2@3097.35,1917.7
NetC11_1: C11.1 U6.19 | length 163.7
  Top Layer w5: U6.19@3841.77,1959.69 3843.46,1958 v1(3853,1958) ; v1(3863,1855) 3868.07,1849.93 C11.1
  Signal Layer 1 w5: v1(3853,1958) 3853,1872 3870,1855 v1(3863,1855)
NetC12_2: C12.2 L1.1 U*1.6 | length 116.8
  Top Layer w5: v1(3124,1971) 3124,1969.13 3134.71,1958.42 3134.71,1949.85 3144.72,1939.84 U*1.6
  Bottom Layer w5: C12.2@3102.45,1935 3102.45,1966.97 L1.1@3117.48,1982
NetC14_2: C14.2 O2.1 U6.9 | length 178.2
  Top Layer w5: O2.1 3570.87,1958.09 3601.47,1927.49 3651.8,1927.49 3659.29,1920 3687.91,1920 U6.9@3688.23,1920.32 ; O2.1@3579.87,1958.5 O2.1@3581.26,1959.89 ; O2.1@3579.87,1961.28 C14.2@3579.87,2000.1
NetC15_2: C15.2 O2.3 U6.10 | length 119.1
  Top Layer w5: C15.2@3597.3,1849.07 3631.01,1882.78 3631.01,1894.37 3637.27,1900.63 U6.10@3688.23,1900.63
NetC18_1: C18.1 U9.10 | length 46
  Top Layer w5: U9.10 3568.83,1606.17 3574.07,1600.93 C18.1@3574.07,1577.35
NetC19_1: C19.1 U9.20 | length 48.7
  Top Layer w5: C19.1 3567.65,1813.5 3585.79,1795.37 3588.36,1795.37 3588.49,1795.23 U9.20 ; C19.1@3569.65,1812.91 C19.1@3569.65,1814.07
NetLED1_2: LED1.2 R7.2 | length 53.5
  Top Layer w5: LED1.2@3082.85,1687.95 3082.85,1688.54 3093.31,1699 3114.87,1699 R7.2@3125.19,1688.68 ; LED1.2@3082.85,1690.05 3083.6,1689.29 3083.9,1689 LED1.2@3084.22,1688.68
NetLED2_2: LED2.2 R8.2 | length 28.1
  Bottom Layer w10: v1(3101.41,1671.03) 3101.41,1670.59 3120.19,1651.81 R8.2
NetLED3_2: LED3.2 R20.1 | length 530.9
  Top Layer w6: v1(3855,1709) 3855,1735.1 LED3.2
  Bottom Layer w5: R20.1 3755.48,2064.5 3770.83,2064.5 3780.5,2054.83 3780.5,2041.17 3770.83,2031.5 3767.35,2031.5 3755.48,2019.63 3755.48,1999.98 3765.97,1989.49 3807.51,1989.49 3836.43,1960.57 3836.43,1944.69
  Bottom Layer w6: 3836.43,1944.69 3836.43,1906.04 3823,1892.61 3823,1844.96 3848.22,1819.74 3848.22,1795.78 3836.43,1784 3836.43,1773.7 3835.92,1773.18 3835.92,1728.08 v1(3855,1709)
NetR6_2: R6.2 U6.16 | length 96.8
  Top Layer w5: U6.16@3841.77,1900.63 3843.19,1899.21 3820,1876.01 3820,1846.87 R6.2@3843.19,1823.68
NetR10_1: R10.1 R11.2 R12.2 U10.3 | length 344.1
  Bottom Layer w5: R10.1@3422.48,2030 3451.48,2059 3521,2059 3544.45,2035.55 R12.2 R11.2@3544.45,1982 ; U10.3 3522,1886.53 3524.3,1888.82 3524.3,1967.85 R11.2 ; R11.2@3542.95,1979.5 R11.2@3545.45,1982
NetR13_1: R13.1 R14.2 R15.2 U10.5 | length 517.5
  Bottom Layer w6: R14.2@3285.55,1800 3285.55,1829.51 3312.59,1856.55 3271.21,1856.55 3265,1850.34 3265,1834.96 3255.04,1825 3240.96,1825 3223.96,1842 3190.55,1842 3149.32,1883.24 3149.32,1932.02 3164.43,1947.13 3171,1947.13 3172,1948.13 3189.57,1948.13 3189.7,1948 3239.04,1948 3241.04,1946 3271.04,1946 3281,1955.96 3281,1988.52 R13.1@3292,1999.52
NetR18_2: R18.2 U4.5 | length 100
  Bottom Layer w6: R18.2@3708.45,1887 R18.2@3722.95,1901.5 ; R18.2 3744.45,1900.45 3779,1935 U4.5
NetR20_2: R20.2 U4.1 | length 223.9
  Bottom Layer w6: U4.1 3697,1935 3728,1966 3728,2018 3726.17,2019.83 3709.19,2019.83 3698.41,2030.61 3689.07,2039.96 3689.07,2056.07 3695,2062 3695,2095 R20.2@3695.55,2095
PB_03: P6.2 U*1.48 | length 90.7
  Top Layer w5: v1(3210,2068) 3221.73,2079.73 U*1.48
  Bottom Layer w5: P6.2@3175.46,2020.66 3175.46,2033.46 3190.5,2048.5 3191.83,2048.5 3210,2066.67 v1(3210,2068)
RESET: P4.19 R2.2 U*1.40 | length 888.7
  Top Layer w5: v1(3378.5,1598.5) 3380.09,1596.91 P4.19 ; v1(3395,1981) 3395,2039 3379.21,2054.79 U*1.40 3379.21,2114.21 3395,2130 3455,2130 3476.32,2108.68 R2.2
  Signal Layer 1 w5: v1@3383.77,1603.77 3383.77,1661 3377.77,1667 3342.28,1667 3326,1683.28 3326,1854.79 3409.71,1938.5 3437.83,1938.5 3450.5,1951.17 3450.5,1998.83 3440.83,2008.5 3411.5,2008.5 3395,1992 v1(3395,1981)
RX: P4.14 U*1.16 | length 141.7
  Top Layer w5: U*1.16 3280.79,1742.21 3286.54,1736.46 3316.54,1736.46 3319,1734 3319,1725.68 3321.27,1723.41 P4.14 3321.27,1661.27
SCK: P4.10 U6.3 U*1.26 | length 1281.6
  Top Layer w5: v1(3273,1605) 3281.91,1613.91 P4.10 ; v1(3446,1829) 3445,1829 3446,1828 3459.42,1841.42 U*1.26 v1@3531.42,1841.42 ; U6.3@3759,2015.77 3759,2036.69 3768.31,2046 3766.32,2048 v1(3764,2048)
  Signal Layer 1 w5: v1(3273,1605) 3273,1577 3296,1554 3444,1554 3455,1565 3455,1681 3428.5,1707.5 3428.5,1810.5 3446,1828 v1(3446,1829) ; v1(3534,1845) 3533.67,1845 3517.5,1828.83 3517.5,1815.17 3527.67,1805 3597,1805 3659.5,1867.5 3789,1867.5 3811,1889.5 3811,2003.32 3766.32,2048 v1(3764,2048)
SCL: P4.11 R16.2 U9.23 U*1.32 | length 1014.1
  Top Layer w5: P4.11 3300,1554.93 3306,1560.93 3304,1562.93 3306,1564.93 v1(3306,1598) ; v1(3380,1870) 3378.5,1871.5 3378.5,1919.98 3400.02,1941.5 3440.83,1941.5 3446.83,1947.5 3452.5,1947.5 3464.53,1959.53 U*1.32 ; v1(3411,1886) 3411,1855.33 3410,1854.33 3429.5,1834.83 3429.5,1822.17 3439.17,1812.5 3462.97,1812.5 3467.16,1808.31 3516.69,1808.31 3529.45,1795.55 U9.23 ; v1@3415.01,1590.01 3428.68,1603.68 3445.19,1603.68 R16.2
  Signal Layer 1 w5: v1(3306,1598) 3307.14,1598 3311.14,1602 3333.07,1580.07 3411.07,1580.07 v1(3420,1589) 3420,1644.58 3387.58,1677 3348,1677 3338,1687 3338,1845 3363,1870 v1(3380,1870) 3387,1863 3410,1886 v1(3411,1886)
SDA: P4.13 R17.2 U9.24 U*1.31 | length 825.8
  Top Layer w5: P4.13 3322.5,1554.59 3322.5,1602.5 3350,1630 3410,1630 ; 3450,1743.36 3450,1670 3410,1630 ; 3450.36,1743 3456,1748.64 3456,1755.07 3464.44,1763.51 3474.84,1763.51 3485.5,1774.17 3485.5,1792.12 3491.69,1798.31 ; R17.2@3456.32,1533.19 3452.47,1533.19 3395,1590.67 3395,1615 3410,1630 ; U*1.31 3489.07,1937.5 3450.98,1937.5 3444.98,1931.5 3404.17,1931.5 3388.5,1915.83 3388.5,1884.83 3400,1873.33 3400,1850 3419.5,1830.5 3419.5,1816.17 3419.43,1816.09 3433.02,1802.5 3458.83,1802.5 3463.02,1798.31 3491.69,1798.31 ; U9.24@3509.77,1772.77 U9.24 3509.77,1780.23 3491.69,1798.31
SWCLK: P4.17 U*1.45 | length 644.5
  Top Layer w5: v1(3258.32,2043.21) 3264.53,2037 3269.26,2037 3280.26,2048 3280.79,2047.48 U*1.45 ; v1(3358,1611) 3360.41,1608.59 P4.17
  Signal Layer 1 w5: v1(3258.32,2043.21) 3261.5,2040.03 3261.5,1994 3253.5,1986 3253.5,1976.02 3242.5,1965.02 3242.5,1957.98 3286,1914.48 3286,1658 ; 3286.5,1658 3286.5,1647.17 3296.17,1637.5 3307.98,1637.5 3328.25,1617.23 3351.77,1617.23 v1(3358,1611)
  Signal Layer 2 w5: v1@3258,2041 3258.32,2041.32 v1(3258.32,2043.21)
SWDIO: P4.15 U*1.46 | length 609.1
  Top Layer w5: v1(3242,2005) 3241.82,2005.18 3241.82,2050.05 3251.48,2059.71 3261.1,2069.33 U*1.46 ; v1(3339.9,1596.57) 3339.9,1597.9 3340.71,1598.71 P4.15
  Signal Layer 1 w5: v1(3242,2005) 3242,1999.33 3232.5,1989.83 3232.5,1953.83 3276,1910.33 3276,1643.52 3292.02,1627.5 3303.83,1627.5 3334.76,1596.57 v1(3339.9,1596.57)
TX: P4.12 U*1.15 | length 596.4
  Top Layer w5: U*1.15 3261.1,1765 3260,1766.1 3260,1793 3275.5,1808.5 3275.5,1942.5 3260,1958 3264,1962 v1(3264,1963) ; v1@3301.59,1654 P4.12 ; v1@3303,1648 v1(3303,1654)
  Signal Layer 1 w5: v1(3264,1963) 3264,1960 3262,1958 3283.5,1936.5 3283.5,1931.12 3296,1918.62 3296,1669 3303,1662 v1(3303,1654) v1@3303,1648
USBM: P4.16 U*1.33 | length 493.9
  Top Layer w5: P4.16 3340.72,1646.28 3344.05,1646.28 v1(3344.27,1646.5) ; v1(3434,1958) 3434,1959 3454.21,1979.21 U*1.33
  Signal Layer 1 w5: 3337.77,1653.5 3331.27,1660 3331.27,1663.87 3316,1679.14 3316,1861 3403.5,1948.5 3412.98,1948.5 3422.48,1958 v1(3434,1958)
USBP: P4.18 U*1.34 | length 586.9
  Top Layer w5: P4.18 3360.77,1694.72 3360.77,1653 v1(3367.27,1646.5) ; v1(3434,1992) 3434,1989 3443.9,1998.9 U*1.34
  Signal Layer 1 w5: v1(3367.27,1646.5) 3360.77,1640 3360.77,1639.67 3351.1,1630 3337.44,1630 3325.77,1641.67 3325.77,1650.56 3321.27,1655.06 3321.27,1659.73 3306,1675 3306,1866 3398.5,1958.5 3408.83,1958.5 3434,1983.67 v1(3434,1992)
VBAT: *1.2 C23.1 P4.1@3203.16,1553.35 pad.1@3701,2090 U4.3 | length 1264.4
  Top Layer w6: v1(3163,1545) 3174,1545 3182.35,1553.35 P4.1@3203.16,1553.35
  Top Layer w16: v1(3664,2044) pad.1@3710,2090
  Bottom Layer w14: 3608,1644.61 3616.09,1652.71 3616.09,1680.83 3625.45,1690.19 3640.07,1690.19 3647.27,1697.39 3648.69,1697.39
  Bottom Layer w16: v1(3163,1545) 3366.02,1545 3386.51,1565.48 3463.04,1565.48 3483.23,1545.29 3535.4,1545.29 3563,1572.89 3563,1591.11 3558.81,1595.31 3558.81,1595.42 3567.19,1603.81 ; *1.2 3566.88,1603.81 3567.19,1603.81 ; 3608,1644.61 3567.19,1603.81 ; 3648.69,1697.39 3648.69,1807.41 3599.52,1856.58 3573.94,1856.58 3565.74,1864.78 3565.74,1917 3587,1938.26 3587,1992 3604.48,2009.48 C23.1 C23.1@3629.21,2009.48 ; v1(3664,2044) 3663.73,2044 C23.1@3629.21,2009.48 ; U4.3@3672.68,2009.48 C23.1@3629.21,2009.48
VBUS: *1.3 C2.1 U1.1 U1.3 U2.1 U2.3 | length 434.3
  Bottom Layer w14: C2.1 3404.35,1659.94 3444.94,1659.94 3500.2,1715.2 3577,1715.2 ; U1.1@3540,1790 3580,1790 ; U2.1 3614.8,1715.2 3577,1715.2 ; U2.3 3614.8,1790 3580,1790 ; 3577,1715.2 3580,1718.2 3580,1790
VCC: C3.1 C6.1 C10.2 C17.1 C20.1 L1.2 P3.1 P4.9 P5.1 P6.1 R2.1 R10.2 R13.2 R16.1 R17.1 U2.5 U6.7 U6.15 U6.18 U8.11 U8.12 U9.8 U9.13 U10.8 U*1.17 U*1.36 U*1.44 | length 4553.6
  Top Layer w5: C6.1@3192.35,2100.38 C6.1@3192.35,2105.93 ; 3207.12,2036 3207.12,2006.66 3221.28,1992.5 3222.83,1992.5 3226.83,1988.5 3250.61,1988.5 3252.61,1990.5 3276,1990.5 3283,1983.5 ; U*1.44 3300.47,2000.97 3283,1983.5 ; 3301.5,1983.5 3283,1983.5 ; C10.2 3487.7,2041.98 U*1.36 ; R17.1@3493.72,1540.19 3504.32,1550.79 3521.17,1550.79 3521.17,1586.45 3520.21,1587.41 3520.21,1597.41 3529.46,1606.67 U9.8 ; v1(3587,2030) 3615.49,2030 3650.19,1995.3 3650.19,1966.82 3652.56,1964.45
  Top Layer w6: v1(3116,1892) 3119.45,1888.55 U8.12 U8.11 ; v1(3147,1801) v1@3147,1808 ; v1(3185,2065) 3185,2062.84 3207.12,2040.72 3207.12,2036 ; U*1.17 3301.47,1769.58 3301.47,1939 ; 3301.54,1983.5 3315,1970.04 3315,1952.53 3301.47,1939 ; R16.1 3459.64,1574.28 R17.1@3493.72,1540.19 ; C10.2 3462.93,2065.93 3417,2020 3417,1984.04 3419,1982.04 3419,1967.96 3413.04,1962 3405.67,1962 3382.67,1939 v1(3325,1939) 3301.47,1939 ; C20.1@3578.29,1550.29 v1(3580,1552) C20.1@3581.71,1550.29 ; 3652.56,1964.45 3658.32,1958.69 U6.7 U6.7@3682.23,1958.69 ; U6.7@3682.23,1959.69 U6.7@3688.23,1959.69 ; U6.15@3798.37,1862.23 3798.37,1840.63 v1(3811,1828) ; U6.18 3849.52,1939 3863.44,1925.08 3863.44,1891.86 3853,1881.42 3853,1873 v1@3836,1856
  Top Layer w8: 3116,1870.59 v1(3116,1892) ; C10.2 3487.7,2077.17 R2.1 ; U9.8 3529.46,1651.46 3563,1685 3593.46,1685 3604,1674.46 3604,1665.26 3617.85,1651.41 3637,1651.41 U9.13
  Top Layer w9: v1(3185,2065) 3183,2065 3178,2070 3192.35,2084.35 C6.1@3192.35,2100.38
  Top Layer w10: C17.1 3652,1847.35 3652,1860 3678.87,1860 3690,1848.87 3690,1827.47 v1(3688.3,1825.77)
  Signal Layer 1 w8: v1(3281.9,1514.1) 3299.9,1532.1 3300.37,1531.63 3461.89,1531.63 3476,1545.74 3573.74,1545.74 v1(3580,1552)
  Signal Layer 1 w10: v1(3116,1892) 3147,1861 v1(3147,1801) ; v1(3576,1693) 3576,1740.27 3597.73,1762 3624.53,1762 v1(3688.3,1825.77) 3808.77,1825.77 v1(3811,1828) 3816,1828 v1(3840,1852)
  Signal Layer 2 w10: v1(3185,2065) 3185,2066.13 3183.13,2068 3202.13,2087 3325,2087 3380,2032 ; v1(3281.9,1514.1) 3284.31,1514.1 3349.7,1579.5 3386.37,1579.5 3397.5,1590.63 3397.5,1593.37 3460.13,1656 3506.38,1656 3543.38,1693 v1(3576,1693) ; v1(3360.55,2027.45) 3375.45,2027.45 3380,2032 ; v1(3688.3,1825.77) 3690,1827.47 3690,1848.87 3585,1953.87 3587,1955.87 v1(3587,2030) 3382,2030 3380,2032
  Bottom Layer w6: P3.1 3111.35,1794.69 3140.69,1794.69 v1(3147,1801) ; 3125.78,2057.22 3155.75,2027.25 P6.1@3155.75,2020.65 ; P5.1@3788.96,1854.25 P5.1 3779.39,1855 3800,1855 3811,1844 v1(3811,1828)
  Bottom Layer w8: L1.2@3050.55,1982 3125.78,2057.22 3139.55,2071 ; v1@3835,1852 v1(3840,1852)
  Bottom Layer w9: L1.2@3050.55,1982 3050.55,1965.19 3071.67,1965.19 3071.67,1906.67 3086.34,1892 v1(3116,1892) ; 3154.28,2085.72 3175,2065 v1(3185,2065)
  Bottom Layer w10: 3139.55,2071 3154.28,2085.72 3163.55,2095 3209.87,2095 3229,2075.87 3229,2074 3236.55,2066.45 R13.2 ; v1(3360.55,2027.45) R10.2 R10.2@3366,2028 ; C3.1 3666.25,1890.25 3649,1873 3649,1836.13 3663.13,1822 3684.53,1822 v1(3688.3,1825.77)
  Bottom Layer w14: U2.5 3749.69,1715 3814.41,1779.72 3814.41,1780.98 3821.43,1788 3821.43,1808.43 3826,1813 v1(3811,1828)
VM: C1.1 U1.5 U8.1 | length 568.2
  Top Layer w12: v1(3041,1858) 3044.65,1854.35 U8.1
  Bottom Layer w10: v1(3041,1858) 3064,1835 3064,1804.55 3086.12,1782.43 3086.12,1781.72 3094,1773.84 3129.5,1773.84 3136.34,1780.69 3188.76,1780.69 ; C1.1@3215.64,1706.94 3195.2,1727.38 3195.2,1774.24 3188.76,1780.69 ; 3265.06,1770.31 3262.13,1773.24 3262.13,1774.24 3255.69,1780.69 3188.76,1780.69
  Bottom Layer w12: C1.1@3215.64,1706.94 C1.1 ; 3265.06,1770.31 3406.14,1770.31 U1.5@3425.83,1790
pads on no net: *1.0 *1.1 *1.NC A1.2 A1.3 A1.4 B1.6 P3.5 P3.6 P4.1@3160.99,1683.77 P4.1@3422.28,1683.75 P5.5 P5.6 P6.5 P6.6 U1.4 U2.4 U9.1 U9.2 U9.3 U9.4 U9.5 U9.6 U9.7 U9.14 U9.15 U9.16 U9.17 U9.19 U9.21 U9.22 U*1.3 U*1.4 U*1.19 U*1.20 U*1.21 U*1.22 U*1.37 U*1.38 U*1.39 U*1.41

## Polygon pours and split planes (outlines as drawn)
GND on Signal Layer 2 "GND" (solid, pour order 4): 3258.07,1515 3258.07,1520 3095.84,1520 3095.84,1520.74 cw(c3460.68,1818.11) 3103.61,2124.78 3366.92,2124.8 3366.92,2186.89 cw(c3425.95,2184.99) 3484.99,2185.94 3485.03,2129.8 3485,2130 3485,2125 3791.76,2125 3791.76,2124.03 cw(c3416.39,1823.74) 3785,1515.2 3376.18,1515.2 3376.18,1458.11 cw(c3317.16,1460.01) 3258.11,1459.06
GND on Bottom Layer "GND" (solid, pour order 8): 3654,1525 3778,1525 3843,1620 3878,1738 3878,1801 3655,1801
GND on Top Layer "GND" (solid, pour order 12): 3661,1531 3785,1531 3845,1634 3875,1763 3873,1809 3659.03,1812.7

## Other copper
Signal Layer 2:
  pour cut-out: 3846,1799.73 3710,1799.73 3706,1620 3827.44,1620 3834,1635 3841,1651 3846,1683 3846,1741

## Silkscreen, mask and mechanical layers (free items; w line width, h text height)
Top Overlay:
  circle w12: c3815,2053 r7.07
  circle w12: c3822,1645 r7.07
  circle w12: c3184,1536 r7.07
  circle w10: c3543,1995 r5
  circle w12: c3515,1745 r7.07
  circle w20: c3653,1575 r11
  lines w8: 3081,1707 3097,1707 ; 3084,1669 3085,1668 3085,1663 ; 3085,1676 3097,1676 ; 3091,1673 3107,1673 ; 3096,1639 3107,1639 ; 3098,1677 3098,1706 ; 3108,1640 3108,1667 ; 3680,2062 3680,2051 3682,2049 3740.37,2049 3742,2050.63 ; 3729,2119 3729,2051 3730,2050 ; 3848,1756 3868,1756 3873,1751 3875,1749 3875,1721 3874,1720 3871,1717 3850,1717
  lines w10: 3660,2091 3687,2091 ; 3673,2077 3673,2107
  text "B1" at 3535,2020 h39.37
  text "B2" at 3595,2020 h39.37
  text "1" at 3027,1595 h39.37
  text "A1" at 3122,1592 h39.37
  text "2" at 3058,1546 h31.5
  text "A2" at 3131,1543 h39.37
Bottom Overlay:
  circle w10: c3524,1947 r4.47
  lines w8: 3136,1707 3167,1707 ; 3150,1721 3150,1695 3152,1693 ; 3198,1672 3208,1672 ; 3206,1672 3227,1672 ; 3213,1660 3213,1684 ; 3349,1740 3352,1740 3381,1740 ; 3364,1727 3364,1756 ; 3639,1892 3651,1892 ; 3653,1870 3653,1912 ; 3675,1858 3703,1858 ; 3689,1847 3689,1867
  text "ENC2" at 3874,1706 h30
  text "ENC1" at 3111,1699 h30
  text "OFF" at 3789,1564 h30
  text "ON" at 3378,1550 h30
Mechanical 1:
  lines w4: 3095.84,1520 3178,1520 ccw(c3187,1520) 3187,1511 3234,1511 cw(c3235.55,1488.45) 3258.11,1490 3258.11,1444 ; 3095.84,1520.74 cw(c3460.68,1818.11) 3103.61,2124.78 3343,2124.8 ccw(c3345.4,2146.4) 3367,2144 ; 3258.11,1444.06 ccw(c3317.16,1445.01) 3376.18,1443.11 ; 3366.92,2144.08 3366.92,2197 ; 3366.93,2196.95 cw(c3425.95,2195.05) 3485,2196 ; 3376.18,1443 3376.18,1491 ; 3376.18,1489 cw(c3402.69,1488.69) 3403,1515.2 3658,1515.2 3785,1515.2 ; 3484.99,2195 3484.99,2150.02 ccw(c3511.01,2150.99) 3512,2125 3791.76,2125 ; 3785.23,1515.48 ccw(c3416.39,1823.74) 3791.76,2124.03
Mechanical 2:
  circle w12: c3808,1665 r5.1
  circle w12: c3518,1747 r5.1
  circle w12: c3032,1860 r5.1
  circle w12: c3814,2052 r5.1
  circle w12: c3212,2048 r5.1
  lines w7.87: 3063,1603 3063,1631 ; 3840,1718 3841,1688 ; 3044,1601 3044,1629 3063,1617 3044,1601 ; 3821,1689 3821,1717 3836,1704 3821,1689
  text "C6,C10,C17,C18" at 3522,2203 h30
  text "C6 0.1uF" at 3122,2100 h12
  text "R2 10k" at 3469,2097 h12
  text "C8 18pF" at 3080,2064 h12
  text "C10 0.1uF" at 3476,2061 h12
  text "C14 6pF" at 3545,2001 h12
  text "01 32Khz" at 3041,1977 h12
  text "U4 NRF24L" at 3709,1959 h12
  text "U1 ATSAMD21" at 3259,1940 h12
  text "02 16Mhz" at 3556,1923 h12
  text "C9 18pF" at 3033,1881 h12
  text "C15 6pF" at 3553,1844 h12
  text "B1 Balun" at 3714,1822 h12
  text "C19 2200pF" at 3524,1810 h12
  text "C16 2200pF" at 3657,1795 h12
  text "C17 0.1uF" at 3652,1784 h12 r90
  text "C11 33nF" at 3874,1771 h12 r90
  text "R6 22K" at 3842,1770 h12 r90
  text "R5 DNP" at 3679,1732 h12
  text "LED3 ORNG" at 3794,1732 h12
  text "U8 DRV8835" at 3087,1726 h12 r90
  text "R3 O" at 3782,1705 h12 r90
  text "R4 DNP" at 3677,1704 h12
  text "U9 MPU6050" at 3506,1695 h12
  text "LED1 BLUE" at 2997,1686 h12
  text "LED2 RED" at 3010,1650 h12
  text "R7 330" at 3132,1638 h12 r90
  text "A1 2.4GHz" at 3703,1632 h12
  text "P4 20Pos" at 3265,1623 h12
  text "C18 0.1uF" at 3519,1578 h12
  text "R16 4.7K" at 3460,1565 h12 r90
  text "C20 10000pF" at 3513,1541 h12
  text "R17 4.7K" at 3421,1533 h12
Mechanical 3:
  text "RED MOTOR" at 3588,2143 h15 r90
  text "BLACK MOTOR" at 3642,2143 h15 r90
  text "R20 1K" at 3774,2089 h15
  text "C5 0.1uF" at 3453,2085 h15
  text "R13 50K" at 3300,2082 h15 r90
  text "P6" at 3193,2066 h15
  text "C23 4.7uF" at 3620,2045 h15 r90
  text "R10 50K" at 3441,2038 h15
  text "R12 200K" at 3558,2023 h15
  text "R11 20K" at 3554,1982 h15
  text "L1 Bead" at 3132,1980 h15
  text "U4 MCP73831T" at 3821,1971 h15
  text "R15 200K" at 3188,1933 h15 r90
  text "R18 4.99K" at 3733,1924 h15 r90
  text "C12 0.1uF" at 3102,1921 h15
  text "+++" at 3688,1913 h15 r90
  text "U10 MCP6422" at 3464,1892 h15
  text "C13 10uF" at 3664,1885 h15
  text "P3" at 3067,1820 h15
  text "P5" at 3849,1816 h15
  text "R14 20K" at 3378,1799 h15
  text "U1 3.3V MTR" at 3534,1754 h15
  text "U2 3.3 Circuit" at 3779,1750 h15
  text "C22 10uF" at 3240,1747 h15
  text "+++" at 3376,1714 h15 r90
  text "+++" at 3238,1701 h15
  text "C2 10uF" at 3354,1687 h15
  text "R8 330" at 3187,1646 h15
  text "RED MOTOR" at 2881,1598 h15
  text "C1 100uF" at 3258,1588 h15
  text "SW1" at 3589,1574 h15
  text "BLACK MOTOR" at 2867,1551 h15
Mechanical 4:
  lines w5: 3005,1897 3004,1742 3134,1743 3136,1898 3005,1899 ; 3103,1668 3103,1640 3178,1640 3178,1666 3109,1666 ; 3103,2119 3103,2014 3260,2015 3259,2124 3103,2123 ; 3180,1727 3180,1560 3260,1560 3260,1721 ; 3250,1730 3393,1730 3393,1663 3260,1663 3259,1724 ; 3267,1849 3524,1848 3524,1955 3274,1954 3276,1851 ; 3383,1511 3743,1513 3738,1683 3381,1686 3383,1513 ; 3404,1802 3403,1814 3574,1814 3576,1700 3405,1700 3405,1804 ; 3647,1918 3820,1916 3819,2030 3650,2031 ; 3756,1905 3887,1905 3887,1744 3759,1745 3759,1901 ; 3259,1724 3260,1781 3132,1781 3133,1724 3259,1724 ; 3011,1905 3012,1962 3138,1962 3139,1905 3011,1905 ; 3032,1951 3033,2008 3159,2008 3160,1951 3032,1951 ; 3150,1819 3207,1818 3207,1946 3150,1945 3150,1819 ; 3261,1968 3318,1967 3318,2095 3261,2094 3261,1968 ; 3267,1836 3268,1779 3394,1779 3395,1836 3267,1836 ; 3327,2001 3328,2058 3454,2058 3455,2001 3327,2001 ; 3348,2062 3476,2062 3475,2119 3349,2119 3348,2062 ; 3447,1952 3448,2009 3574,2009 3575,1952 3447,1952 ; 3449,2005 3450,2062 3576,2062 3577,2005 3449,2005 ; 3575,1917 3576,1860 3702,1860 3703,1917 3575,1917 ; 3584,1804 3587,1697 3760,1696 3755,1805 3584,1804 ; 3592,1912 3649,1913 3649,2039 3592,2040 3592,1912 ; 3665,2063 3666,2120 3792,2120 3793,2063 3665,2063 ; 3698,1799 3755,1798 3755,1926 3698,1925 3698,1799
Mechanical 15:
  circle w10: c3445,1820 r472.44
  circle w3.94: c3314,1444 r69.88
  circle w3.94: c3425,2190 r69.88
  circle w5: c3425.98,2186.89 r39.37
  circle w5: c3317.13,1458.11 r39.37

## Text inside footprints (layer, text, board x,y; h text height)
B1: Top Overlay "o" at 3785.55,1773.43 h30 r270
U8: Top Overlay "o" at 3024.89,1850.29 h30
U9: Top Overlay "1" at 3464,1780.26 h30